# EAGLE board base (EAGLE 8.3.1)
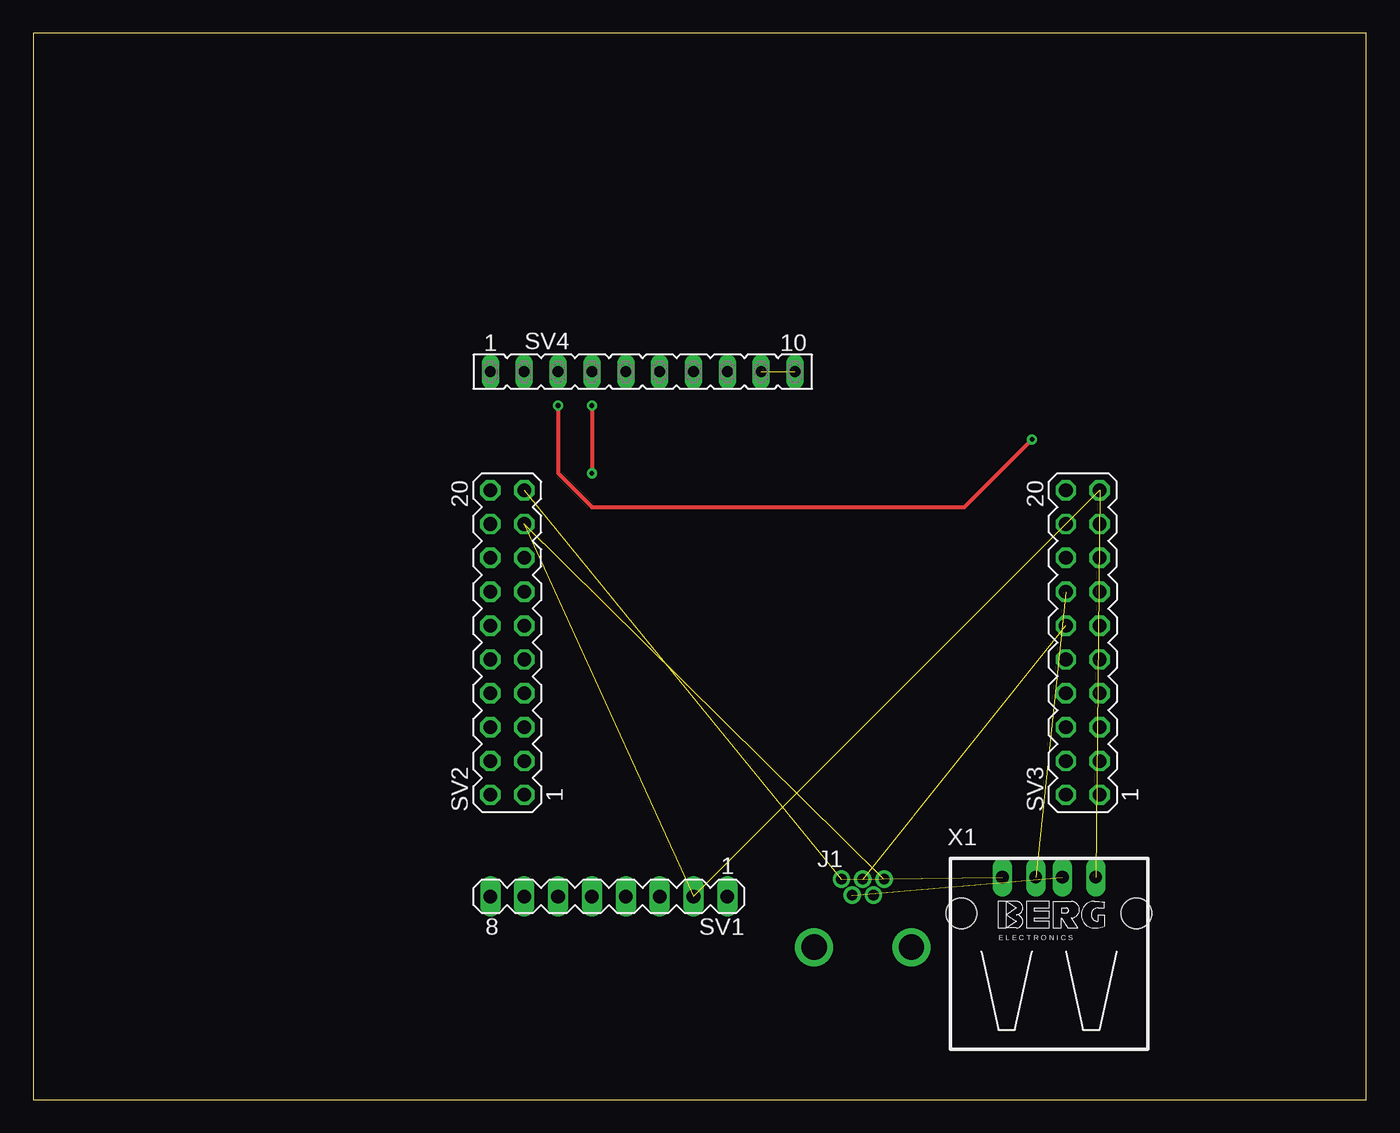
[diagram p0: board, top side]
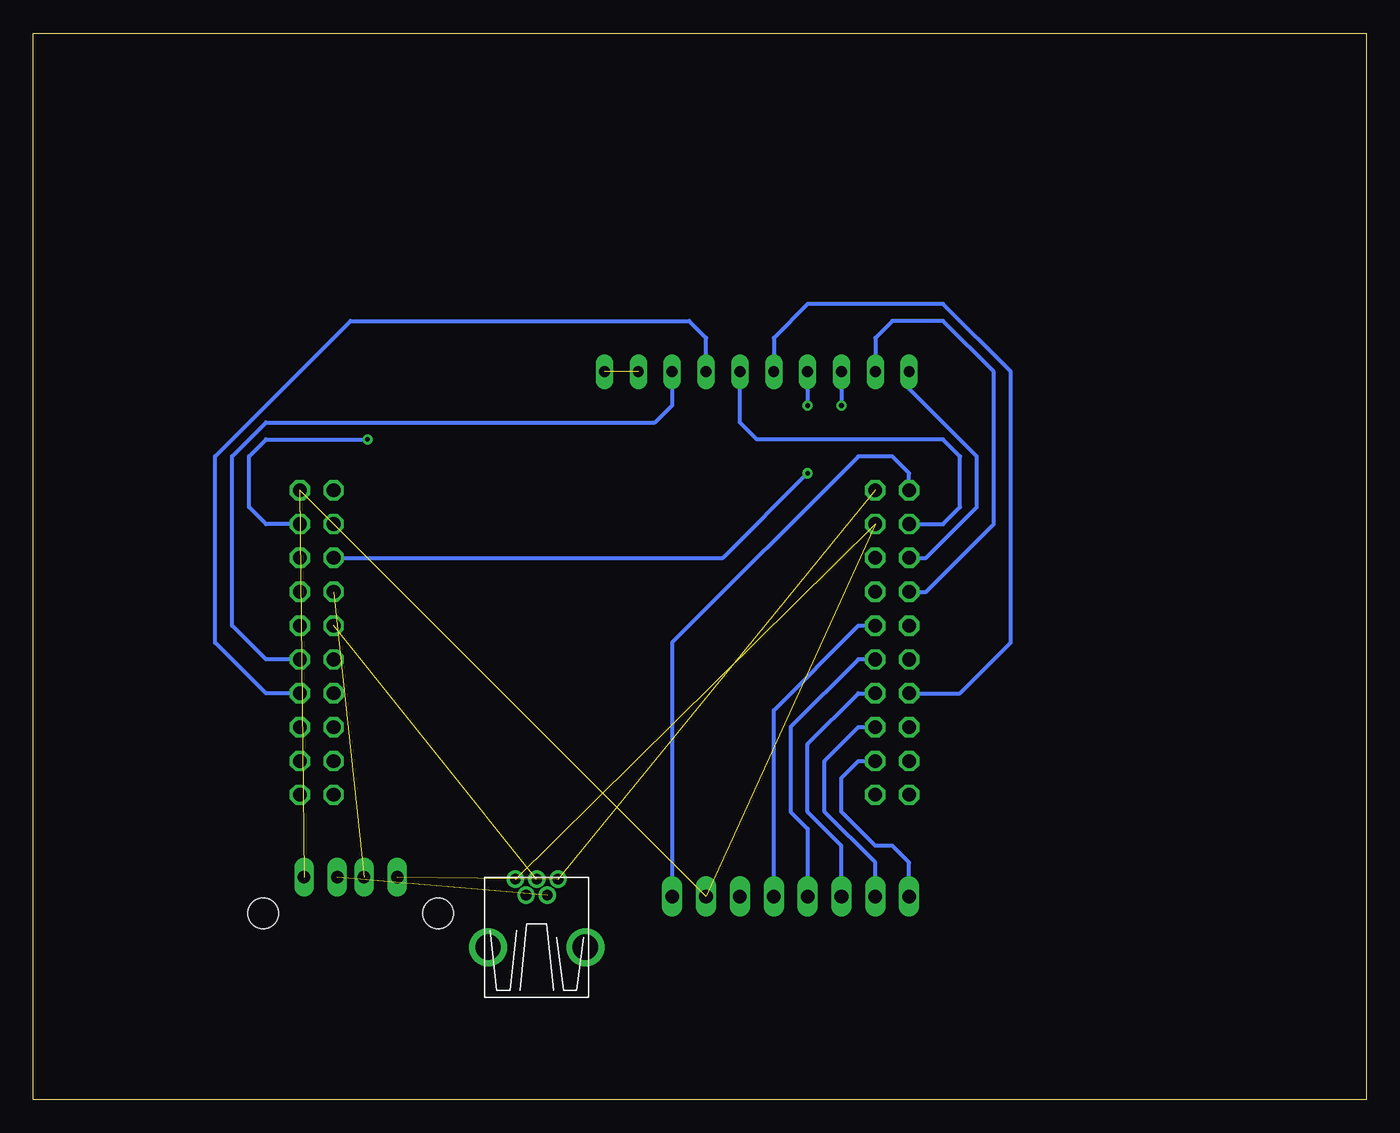
[diagram p1: board, bottom side, seen from below]

Size 100 x 80 mm. Coordinates in mm from the lower left corner, seen from the top.
Outline: 0,0 100,0 100,80 0,80 0,0
Copper layers (1*16): Top 0.035mm / dielectric 1.5mm / Bottom 0.035mm
Design rules "default": minimum track width 6mil, minimum drill 0.35mm, track to track 6mil, track to pad 6mil, pad to pad 6mil, via to via 6mil, smd to smd 6mil, copper to edge 40mil, drill to drill 6mil, minimum pad ring 10mil, minimum via ring 8mil, stop-mask expansion 4mil, vias tented up to drill 0mil, thermal gap 10mil

## Footprints (pad centres in the part's own frame; a part is rotated, then mirrored left to right if it is on the bottom)
USB-MB-H = drill 0.8: D+ 5.1,0; D- 3.9,0.8; GND 5.1,-1.6; ID 3.9,-0.8; VBUS 5.1,1.6 | drill 1.9: P$6 0,-3.65; P$7 0,3.65
MA08-1 = drill 1.016 long: 1 -8.89,0; 2 -6.35,0; 3 -3.81,0; 4 -1.27,0; 5 1.27,0; 6 3.81,0; 7 6.35,0; 8 8.89,0
MA10-2 = drill 1.016 octagon: 1 -11.43,-1.27; 2 -11.43,1.27; 3 -8.89,-1.27; 4 -8.89,1.27; 5 -6.35,-1.27; 6 -6.35,1.27; 7 -3.81,-1.27; 8 -3.81,1.27; 9 -1.27,-1.27; 10 -1.27,1.27; 11 1.27,-1.27; 12 1.27,1.27; 13 3.81,-1.27; 14 3.81,1.27; 15 6.35,-1.27; 16 6.35,1.27; 17 8.89,-1.27; 18 8.89,1.27; 19 11.43,-1.27; 20 11.43,1.27
FE10 = drill 0.813 long: 1 -11.43,0; 2 -8.89,0; 3 -6.35,0; 4 -3.81,0; 5 -1.27,0; 6 1.27,0; 7 3.81,0; 8 6.35,0; 9 8.89,0; 10 11.43,0
PN87520 = drill 0.95 long: 1 -3.5,2.71; 2 -1,2.71; 3 1,2.71; 4 3.5,2.71 | hole 2.3: -6.57,0; 6.57,0

## Placement (x,y rotation side)
J1  USB-MB-H  [USB-MB-H]  62.23,11.43 90 top
SV1  [MA08-1]  43.18,15.24 180 top
SV2  [MA10-2]  35.56,34.29 90 top
SV3  [MA10-2]  78.74,34.29 90 top
SV4  [FE10]  45.72,54.61 0 top
X1  [PN87520]  76.2,13.97 0 top

## Library data of the parts
J1 = SparkFun-Retired
SV1-SV3 = con-lstb; OC_FARNELL: unknown; OC_NEWARK: unknown
SV4 = con-lsta; OC_FARNELL: unknown; OC_NEWARK: unknown
X1 = con-berg; OC_FARNELL: unknown; OC_NEWARK: unknown

## Nets
AIN: SV1.4 SV2.11
D1: SV1.5 SV2.9
D2: SV1.6 SV2.7
D3: SV1.7 SV2.5
D4: SV1.8 SV2.3
D-C: SV2.4
DAC0: SV2.16 SV4.1
DAC1: SV2.14 SV4.2
DAC2: SV3.17 SV4.3
DAC3: SV3.16 SV4.4
DAC4: SV2.8 SV4.5
DAC5: SV2.18 SV4.6
DAC6: SV3.7 SV4.7
DAC7: SV3.9 SV4.8
DACOUT: SV4.9 SV4.10
GND: J1.GND SV1.2 SV2.17 SV3.19 X1.4
RST: SV2.2
RX: SV3.14 X1.2
SN: J1.D- X1.3
SSIOCLK: SV3.1
SSIOFSS: SV3.3
SSIOTX: SV2.6
TX: J1.D+ SV3.12
VBUS: J1.VBUS SV2.19 X1.1
VCC: SV1.1 SV2.20

## Tracks (layer width: path | path; a pad name or v marks a point on that pad's centre or on a via)
AIN
  Bottom 0.305: SV1.4 44.45,29.21 38.1,35.56 SV2.11
D1
  Bottom 0.305: SV2.9 38.1,33.02 43.18,27.94 43.18,21.59 41.91,20.32 SV1.5
D2
  Bottom 0.305: SV1.6 39.37,19.05 41.91,21.59 41.91,26.67 38.1,30.48 SV2.7
D3
  Bottom 0.305: SV1.7 36.83,17.78 40.64,21.59 40.64,25.4 38.1,27.94 SV2.5
D4
  Bottom 0.305: SV1.8 34.29,17.78 35.56,19.05 36.83,19.05 39.37,21.59 39.37,24.13 38.1,25.4 SV2.3
DAC0
  Bottom 0.305: SV2.16 33.02,40.64 29.21,44.45 29.21,48.26 34.29,53.34 SV4.1
DAC1
  Bottom 0.305: SV2.14 33.02,38.1 27.94,43.18 27.94,54.61 31.75,58.42 35.56,58.42 36.83,57.15 SV4.2
DAC2  (via drill 0.35)
  Top 0.305: v39.37,52.07 39.37,46.99 41.91,44.45 69.85,44.45 v74.93,49.53
  Bottom 0.305: SV4.3 v39.37,52.07 | SV3.17 82.55,43.18 83.82,44.45 83.82,48.26 82.55,49.53 v74.93,49.53
DAC3  (via drill 0.35)
  Top 0.305: v41.91,52.07 v41.91,46.99
  Bottom 0.305: SV4.4 v41.91,52.07 | SV3.16 48.26,40.64 v41.91,46.99
DAC4
  Bottom 0.305: SV2.8 30.48,30.48 26.67,34.29 26.67,54.61 31.75,59.69 41.91,59.69 44.45,57.15 SV4.5
DAC5
  Bottom 0.305: SV2.18 31.75,43.18 30.48,44.45 30.48,48.26 31.75,49.53 45.72,49.53 46.99,50.8 SV4.6
DAC6
  Bottom 0.305: SV4.7 49.53,57.15 50.8,58.42 76.2,58.42 86.36,48.26 86.36,34.29 82.55,30.48 SV3.7
DAC7
  Bottom 0.305: SV4.8 52.07,52.07 53.34,50.8 82.55,50.8 85.09,48.26 85.09,35.56 82.55,33.02 SV3.9
DACOUT  (1 unrouted)
GND  (4 unrouted)
RX  (1 unrouted)
SN  (1 unrouted)
TX  (1 unrouted)
VBUS  (2 unrouted)
VCC
  Bottom 0.305: SV2.20 34.29,46.99 35.56,48.26 38.1,48.26 52.07,34.29 SV1.1